# Altium PCB Mini-Rambo-ATX.PcbDoc (part 1 of 3)
Units mil, origin at the board's own origin, x right, y up, seen from the top; angles counter-clockwise.
Board outline 4133.86 x 2795.28 mil, 4 copper layers (Top, GND, Supply, Bottom), stack 61.811 mil thick; 252 components, 203 nets, 844 pads, 559 vias.
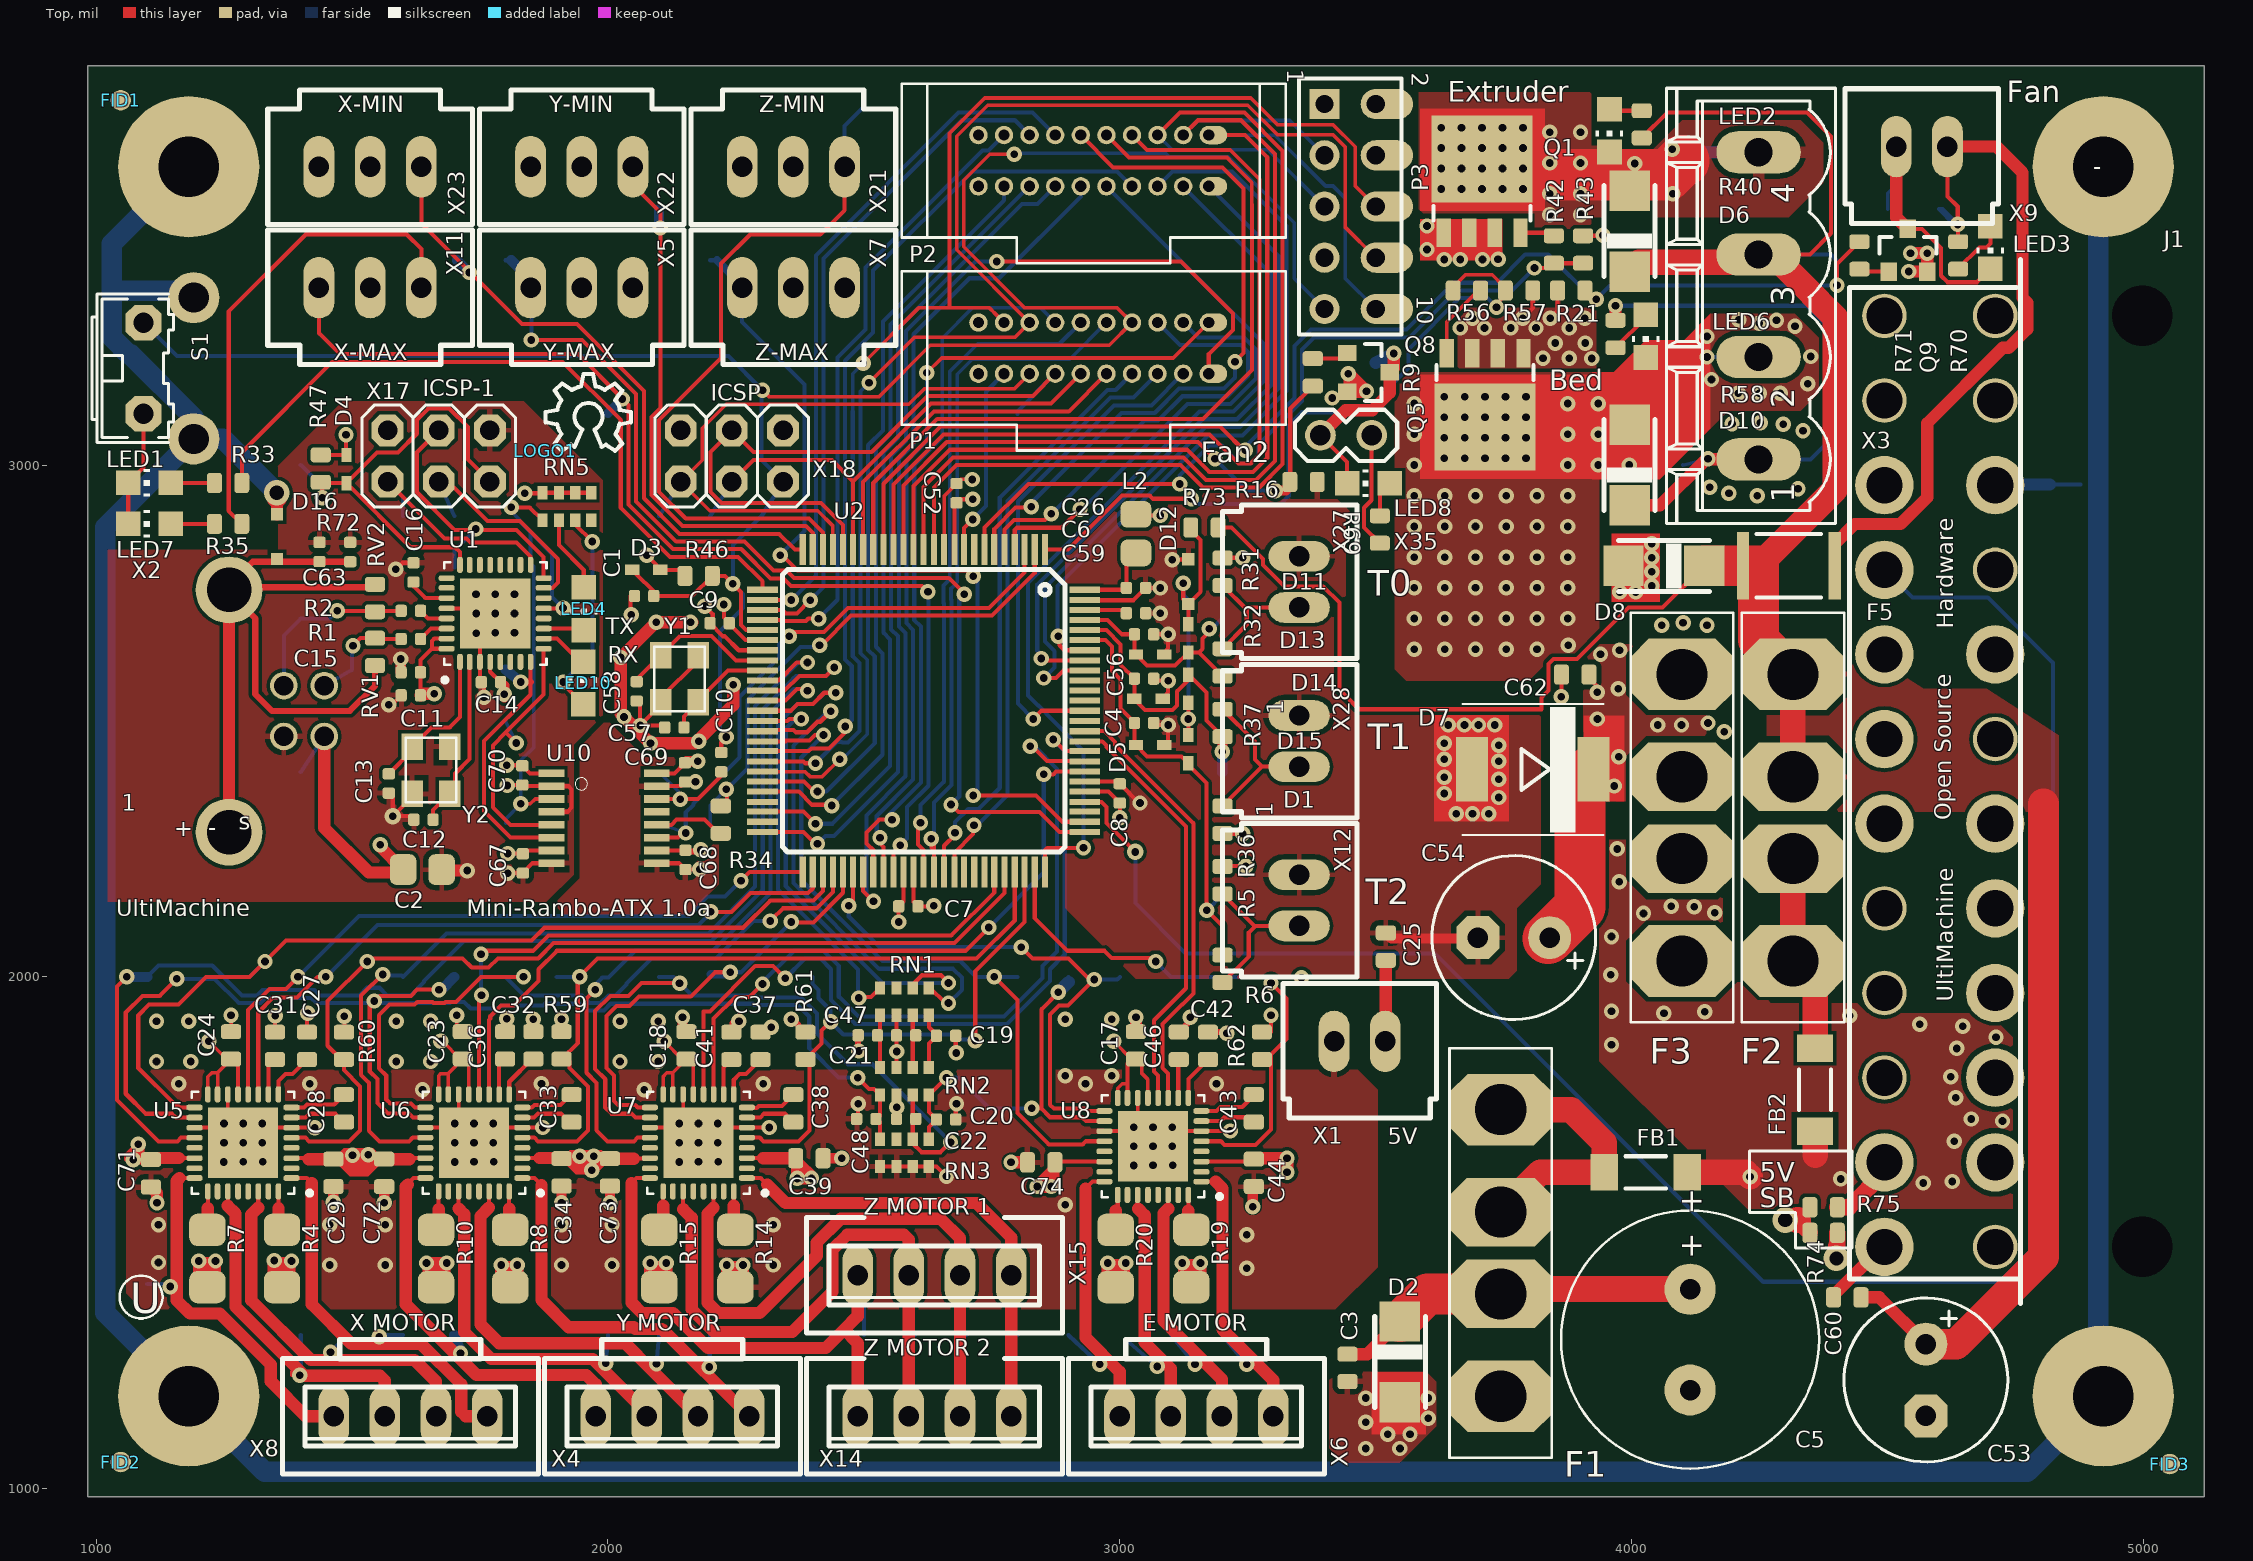
[diagram p0: Top view]
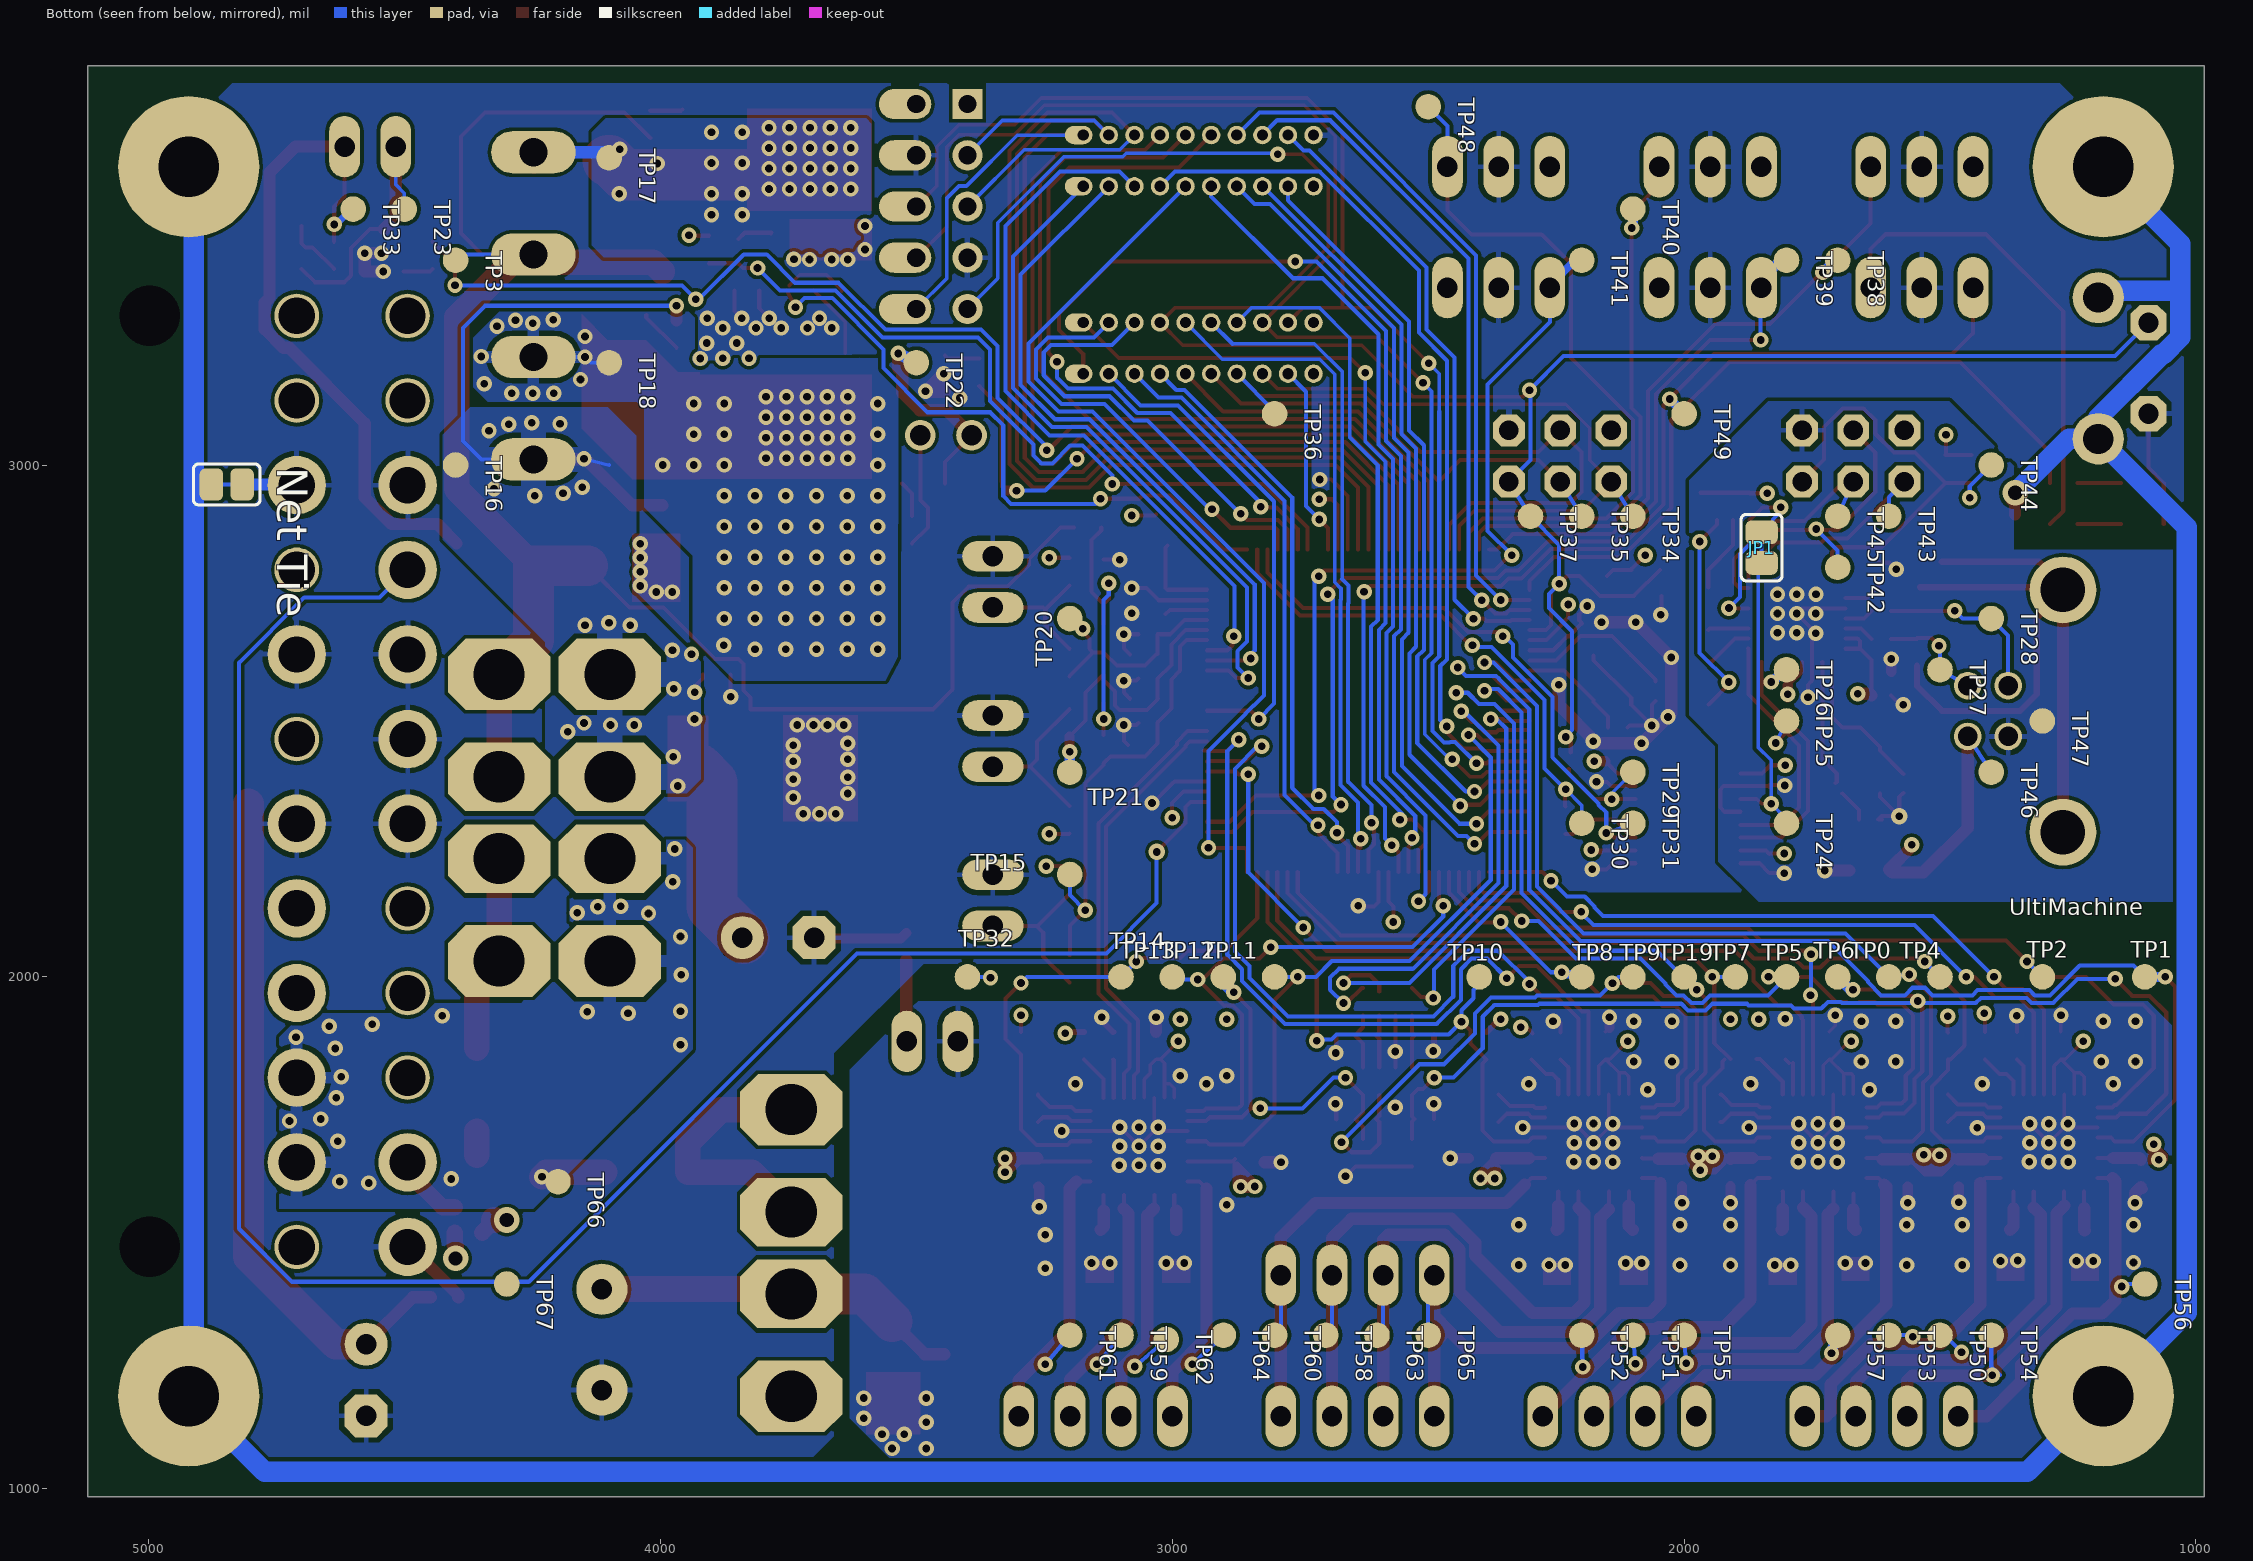
[diagram p1: Bottom view, seen from below]
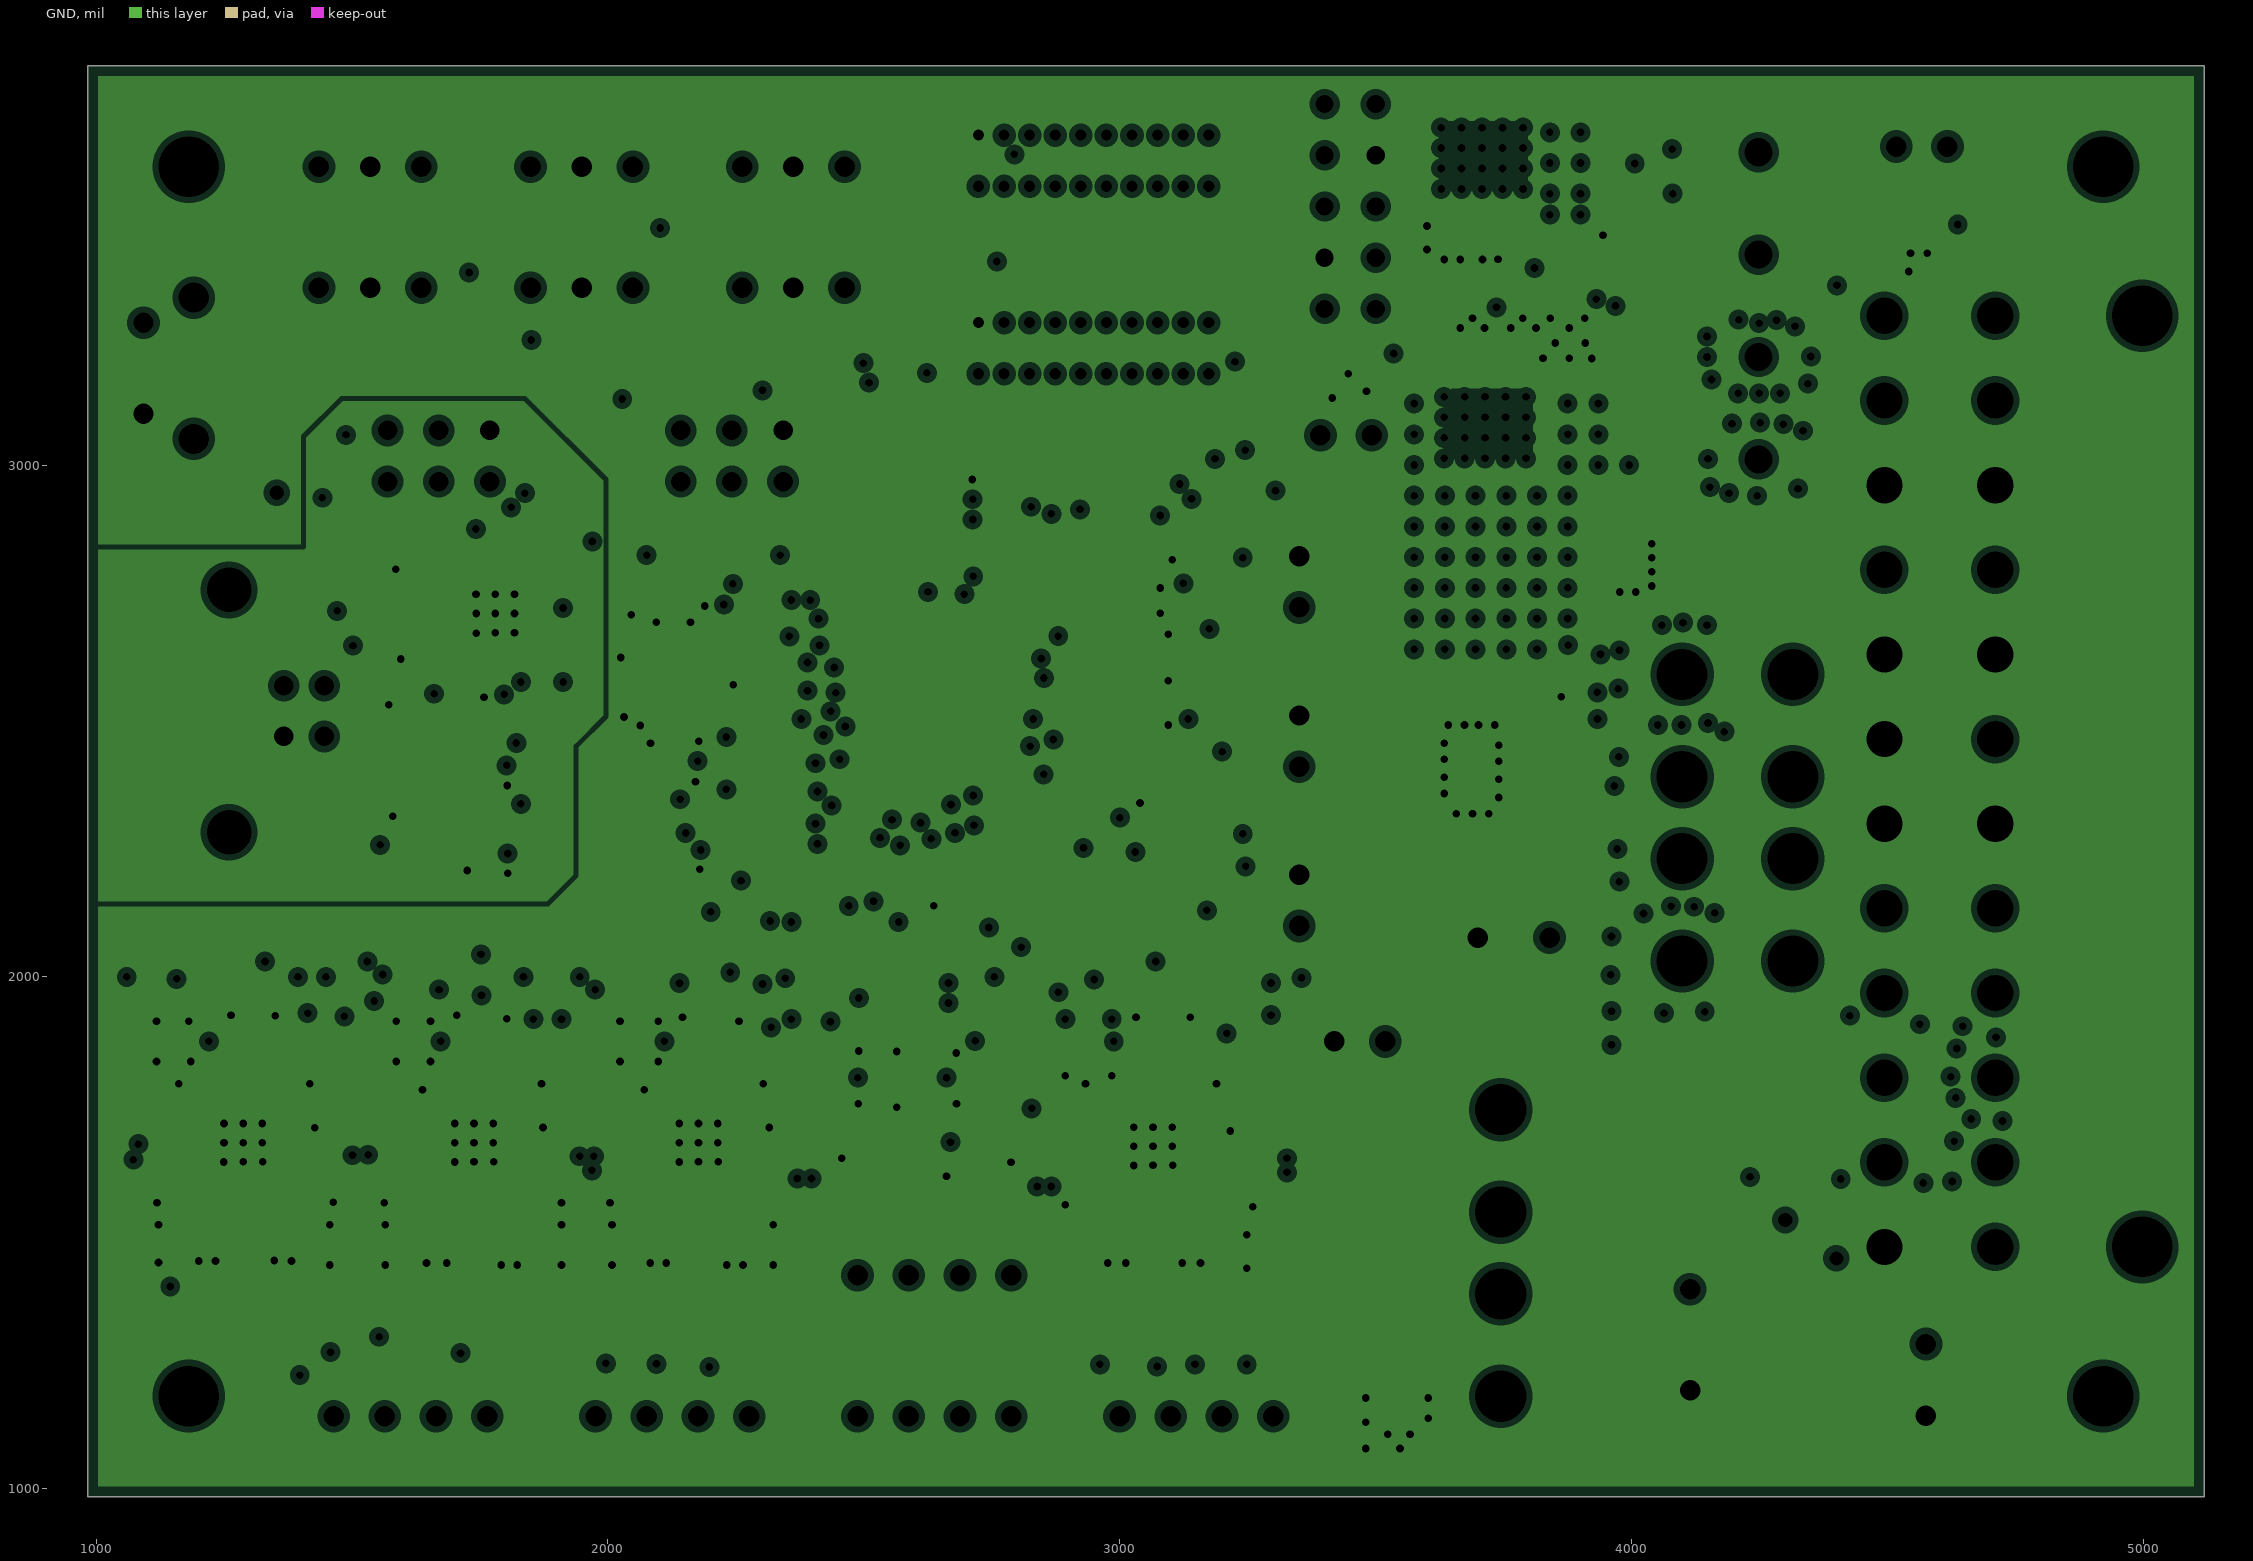
[diagram p2: GND, clearances drawn from the general rule]
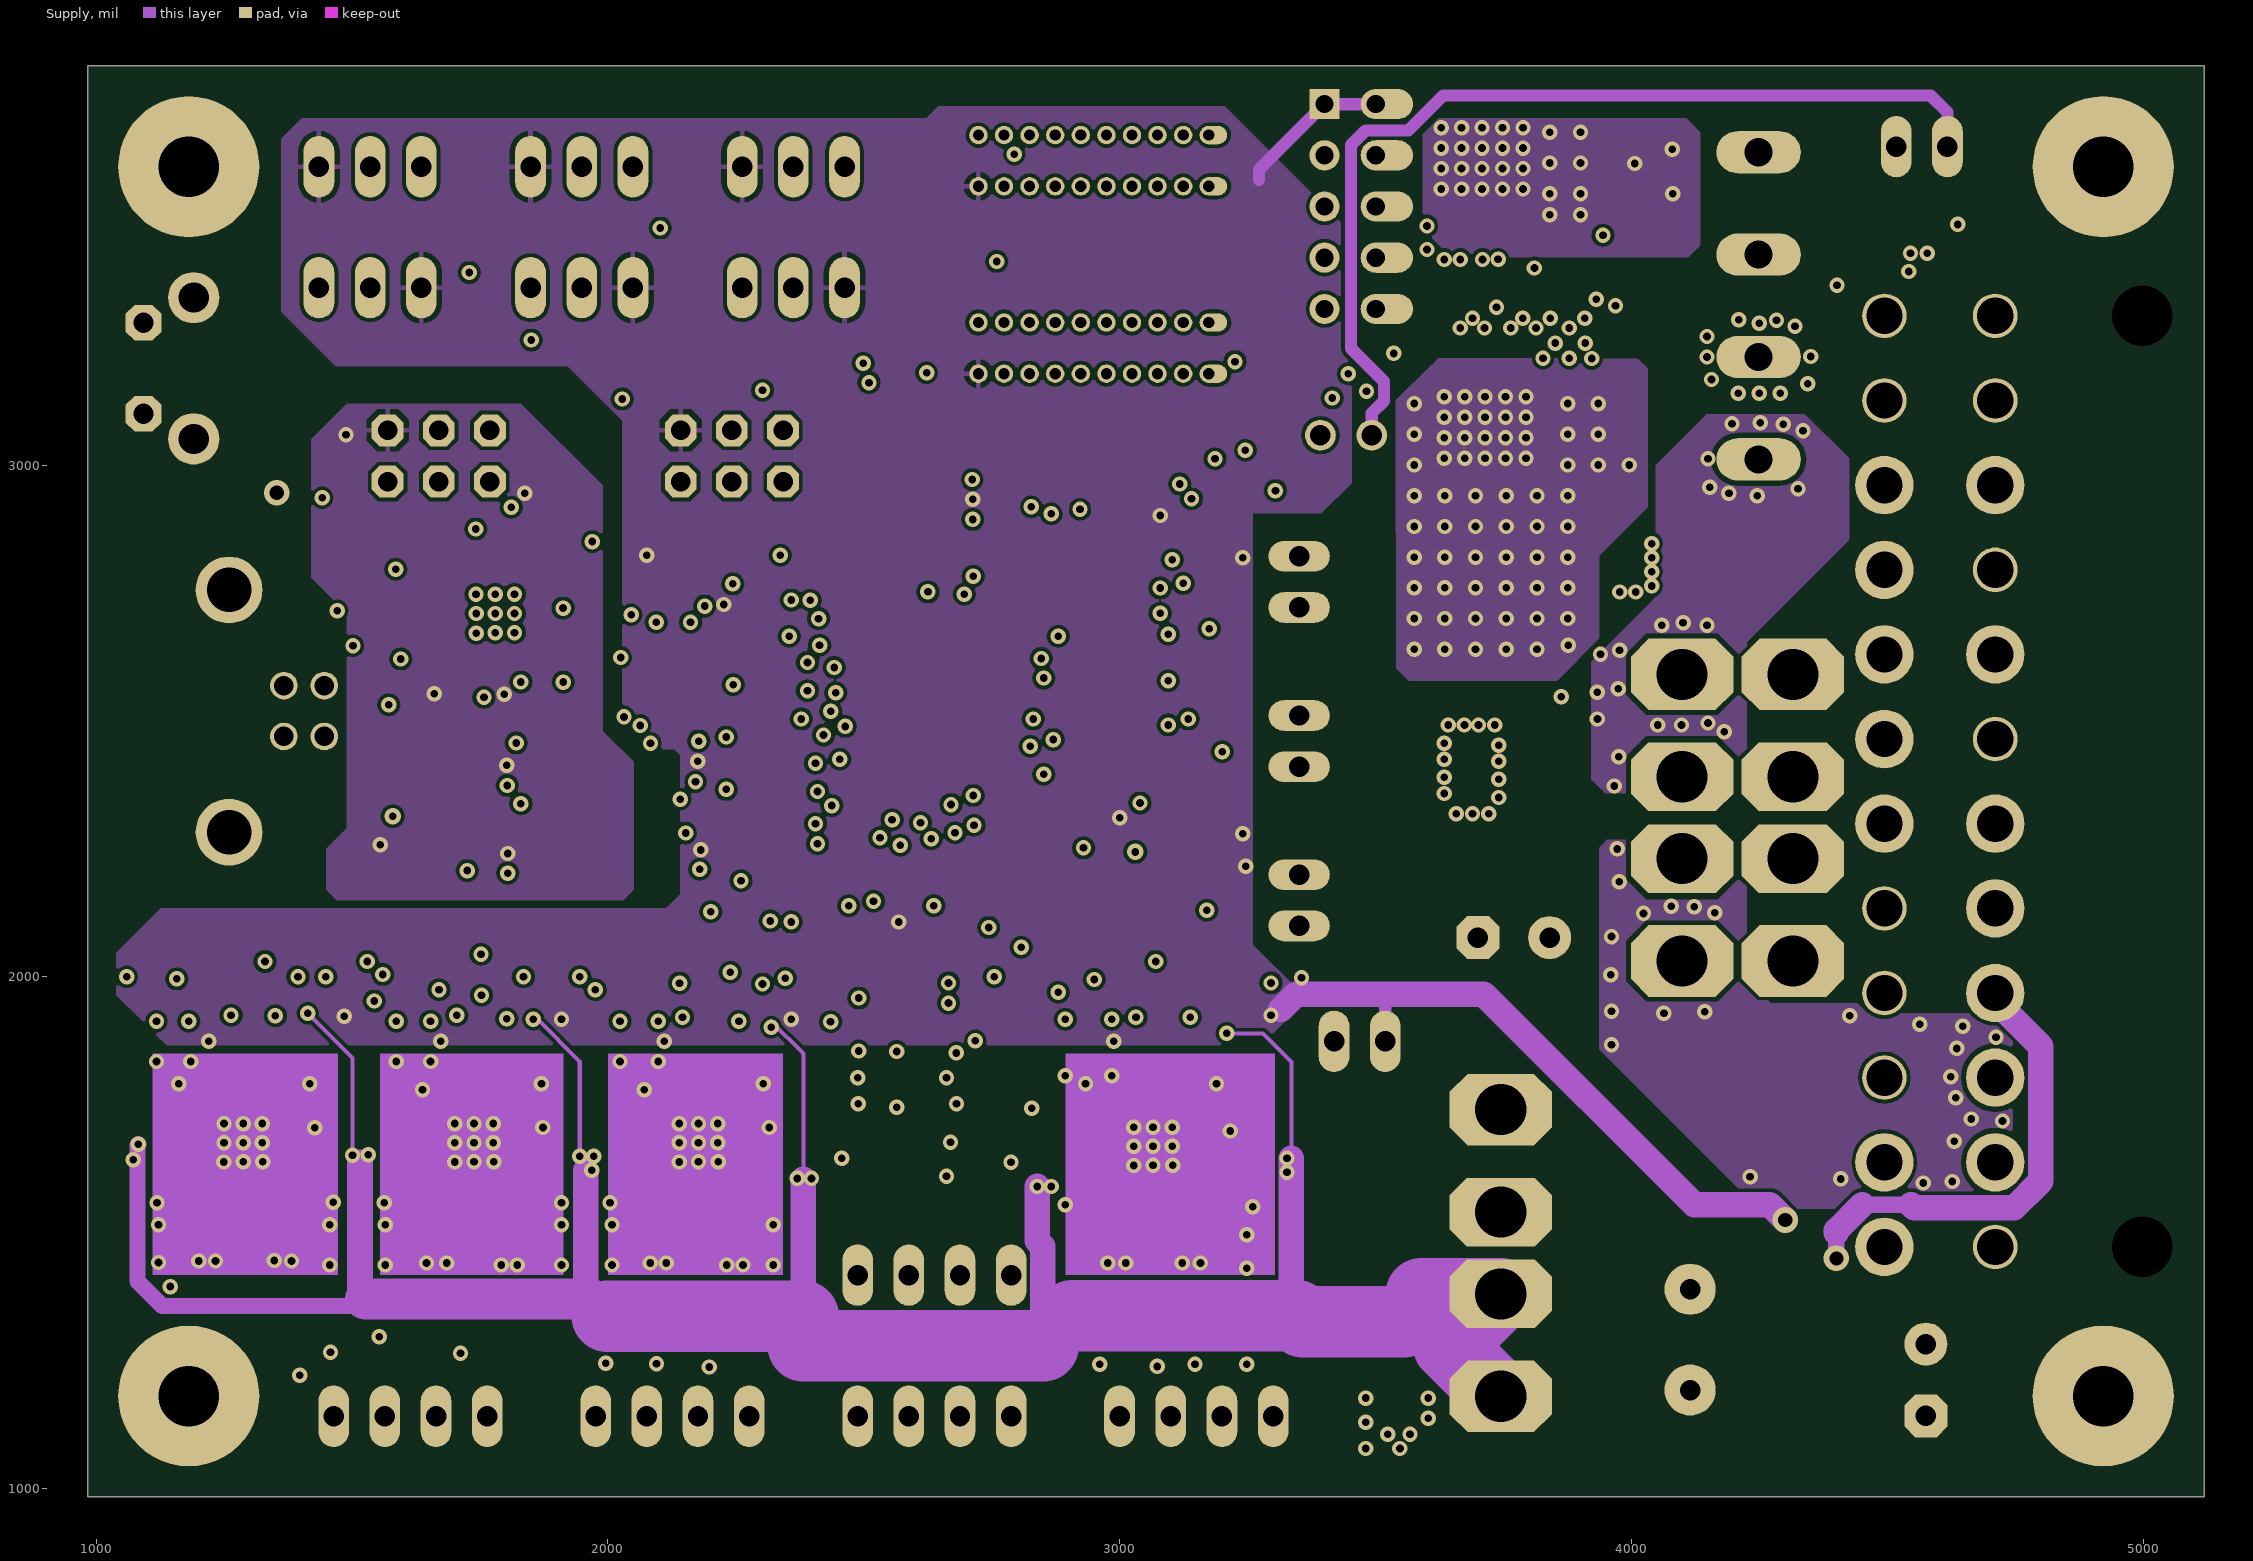
[diagram p3: Supply]

## Layer stack, top to bottom
Top Solder: solder mask 0.4724, Solder Resist, Dk 3.5
Top: signal copper 2.7559
Dielectric 1: prepreg 21.6535, FR-4, Dk 4.2
GND: plane copper 1.378, net (Multiple Nets)
Dielectric 2: core 10.2362, FR-4, Dk 4.2
Supply: signal copper 1.378
Dielectric 3: prepreg 21.6535, FR-4, Dk 4.2
Bottom: signal copper 2.7559
Bottom Solder: solder mask 0.4724, Solder Resist, Dk 3.5

## Board outline
984.25,984.25 984.25,3779.53 5118.11,3779.53 5118.11,984.25

## Design rules (kind name [scope] priority, off if disabled: settings)
AcuteAngle [All] p1: minimum=6.00000000000000E+0001 checktracksonly=FALSE
Clearance mdViaVia [IsVia vs IsVia] p1: gap=7
Clearance mdPadVia [IsPad vs IsVia] p2: gap=7
Clearance mdPadPad [IsPad vs IsPad] p3: gap=7
Clearance mdWireVia [(InLayerClass('Signal Layers') AND IsTrack) vs IsVia] p4: gap=7
Clearance mdWirePad [(InLayerClass('Signal Layers') AND IsTrack) vs IsPad] p5: gap=7
Clearance mdWireWire [(InLayerClass('Signal Layers') AND IsTrack) vs (InLayerClass('Signal Layers') AND IsTrack)] p6: gap=7
Clearance [All] p7: gap=7
ComponentClearance ComponentClearance_Connectors [InComponentClass('Connectors')] p1: gap=1 collisioncheckmode=3 verticalgap=10 showdistances=FALSE
ComponentClearance [All] p2: gap=10 collisioncheckmode=3 verticalgap=10 showdistances=FALSE
HoleSize [All] p1: absolutevalues=TRUE maxlimit=100000 minlimit=15 maxpercent=80.000 minpercent=20.000
HoleToHoleClearance [All] p1: gap=8 allowstackedmicrovias=TRUE
MinimumAnnularRing [All] p1: minimumring=7
MinimumSolderMaskSliver [All] p1: minsoldermaskwidth=4
PasteMaskExpansion [All] p1: expansion=-1
PlaneClearance [All] p1: clearance=12
PlaneConnect PowerPlaneConnect [InNet('+12V')] p1: planeconnectstyle=Relief reliefexpansion=20 reliefentries=4 reliefconductorwidth=24 reliefairgap=10
PlaneConnect PlaneConnect_Via [IsVia] p2: planeconnectstyle=Direct reliefexpansion=20 reliefentries=4 reliefconductorwidth=10 reliefairgap=10
PlaneConnect [All] p3: planeconnectstyle=Relief reliefexpansion=20 reliefentries=4 reliefconductorwidth=10 reliefairgap=10
PolygonConnect "ThermalVias, TP" [IsVia Or HasFootprint('TP1-27')] p1: connectstyle=Direct reliefconductorwidth=10 reliefentries=4 polygonreliefangle="90 Angle" airgapwidth=10
PolygonConnect BedOutConnect [OnTopLayer  AND InNet('NetD10_A')] p2: connectstyle=NoConnect reliefconductorwidth=10 reliefentries=4 polygonreliefangle="90 Angle" airgapwidth=10 // Disconnect toplayer connect
PolygonConnect PolygonConnect_12V3-Bot [InNet('+12V3') vs OnLayer('Bottom')] p3: connectstyle=Relief reliefconductorwidth=50 reliefentries=4 polygonreliefangle="90 Angle" airgapwidth=10
PolygonConnect PolygonConnect_12V3other [InNet('+12V3')] p4: connectstyle=NoConnect reliefconductorwidth=50 reliefentries=4 polygonreliefangle="90 Angle" airgapwidth=10
PolygonConnect PolygonConnect_Fets [(InNet('NetD6_A') OR InNet('NetD10_A'))] p5: connectstyle=Relief reliefconductorwidth=24 reliefentries=4 polygonreliefangle="90 Angle" airgapwidth=10
PolygonConnect PolygonConnect_Direct [InComponent('Q5')] p6: connectstyle=Direct reliefconductorwidth=24 reliefentries=4 polygonreliefangle="90 Angle" airgapwidth=10
PolygonConnect PolygonConnect_Fets_12V-INbot [InNet('12V-IN') vs OnLayer('Bottom')] p7: connectstyle=Relief reliefconductorwidth=24 reliefentries=4 polygonreliefangle="90 Angle" airgapwidth=10
PolygonConnect PolygonConnect_Fets_12V-INoth [InNet('12V-IN')] p8: connectstyle=NoConnect reliefconductorwidth=24 reliefentries=4 polygonreliefangle="90 Angle" airgapwidth=10
PolygonConnect [All] p9: connectstyle=Relief reliefconductorwidth=10 reliefentries=4 polygonreliefangle="90 Angle" airgapwidth=10
RoutingVias [All] p1: holewidth=15 width=30 viastyle="Through Hole" minholewidth=15 minwidth=30 maxholewidth=28 maxwidth=50
SMDToCorner [All] p1: distance=30000
SilkToSilkClearance [All] p1 off: silktosilkclearance=10
SilkToSolderMaskClearance [IsPad] p1 off: minsilkscreentomaskgap=10 clearancetoexposedcopper=TRUE
SolderMaskExpansion ViaTent [(IsVia)  And (HoleDiameter < 0.635   )] p1: expansion=-50
SolderMaskExpansion SolderMaskExpansion_Via [IsVia] p2: expansion=-20
SolderMaskExpansion [All] p3: expansion=3
UnConnectedPin [All] p1:
Width [All] p1: maxlimit=250 minlimit=7 preferedwidth=24 toplayer_prefwidth=8 midlayer1_minwidth=8 bottomlayer_maxwidth=40 bottomlayer_prefwidth=8 minimp=50.000000 maximp=50.000000 favimp=50.000000
20 further rules are at their usual default settings.

## Classes and differential pairs
component class Power-ATX: C3 C25 C53 C54 C60 C62 D2 D7 D8 F1 F2 F3 F5 FB1 FB2 J1 "Net Tie" R74 R75 TP32 TP66 TP67 X1 X16
component class Motors: C5 C17 C18 C23 C24 C27 C28 C29 C31 C32 C33 C34 C36 C37 C38 C39 C41 C42 C43 C44 C46 C71 C72 C73 C74 R4 R7 R8 R10 R14 R15 R19 R20 R59 R60 R61 R62 TP0 TP1 TP2 TP4 TP5 TP6 TP7 TP8 TP9 TP10 TP11 TP12 TP13 TP14 TP19 TP50 TP51 TP52 TP53 TP54 TP55 TP56 TP57 TP58 TP59 TP60 TP61 TP62 TP63 TP64 TP65 U5 U6 U7 U8 X4 X6 X8 X14 X15

## Components (designator, comment, footprint, x,y, rotation, side; value= is the part's Value field where it differs from the comment)
C1 "22pF" C0402 2070.87,2744.09 r180 top
C2 "10uF" C0805 1637.8,2209.65 r180 top
C3 "100nF" C0603 3444.88,1236.22 r270 top
C4 "100nF" C0402 3047.24,2496.06 r0 top
C5 "470uF" C12,5-5 4114.17,1291.34 r270 top
C6 "100nF" C0402 3031.5,2710.63 r0 top
C7 "100nF" C0402 2586.61,2137.8 r0 top
C8 "100nF" C0402 3000,2358.27 r90 top
C9 "100nF" C0402 2218.5,2690.94 r180 top
C10 "100nF" C0402 2221.46,2419.29 r90 top
C11 "100nF" C0402 1615,2550 r180 top
C12 "22pF" C0402 1639.76,2307.09 r180 top
C13 "22pF" C0402 1571.85,2377.95 r270 top
C14 "100nF" C0402 1771.65,2575.79 r180 top
C15 "100nF" C0402 1615,2595 r180 top
C16 "1uF" C0402 1620,2790 r90 top
C17 "100nF" C0603 3031.5,1866.14 r90 top
C18 "100nF" C0603 2153.54,1866.14 r90 top
C19 "1uF" C0402 2660.43,1884.84 r0 top
C20 "1uF" C0402 2660.43,1721.46 r0 top
C21 "1uF" C0402 2582.68,1885.83 r180 top
C22 "1uF" C0402 2582.68,1722.44 r180 top
C23 "100nF" C0603 1716.54,1866.14 r90 top
C24 "100nF" C0603 1263.78,1866.14 r90 top
C25 "100nF" C0603 3519.68,2059.06 r90 top
C26 "100nF" C0402 3031.5,2759.84 r0 top
C27 "100nF" C0603 1412.06,1865.33 r270 top
C28 "100nF" C0603 1484.25,1743.11 r90 top
C29 "100nF" C0603 1463.58,1617.13 r270 top
C31 "220nF" C0603 1349.42,1865.33 r270 top
C32 "100nF" C0603 1854.33,1866.14 r270 top
C33 "100nF" C0603 1929.13,1743.11 r90 top
C34 "100nF" C0603 1909.45,1618.11 r270 top
C36 "220nF" C0603 1799.21,1866.14 r270 top
C37 "100nF" C0603 2298.23,1865.16 r270 top
C38 "100nF" C0603 2362.2,1743.11 r90 top
C39 "100nF" C0603 2393.7,1645.67 r0 top
C41 "220nF" C0603 2241.14,1865.16 r270 top
C42 "100nF" C0603 3172.24,1865.33 r270 top
C43 "100nF" C0603 3261.81,1743.11 r90 top
C44 "100nF" C0603 3261.81,1617.13 r270 top
C46 "220nF" C0603 3115.16,1865.33 r270 top
C47 "1uF" C0402 2507.87,1885.83 r180 top
C48 "1uF" C0402 2504.92,1722.44 r180 top
C52 "100nF" C0402 2681.1,2944.88 r90 top
C53 "100uF" C3,5-8 4574.8,1212.6 r270 top
C54 "100uF" C3,5-8 3769.68,2076.77 r180 top
C56 "100nF" C0402 3047.24,2582.68 r0 top
C57 "22pF" C0402 2129.92,2487.2 r180 top
C58 "22pF" C0402 2056.1,2558.07 r270 top
C59 "100nF" C0402 3047.24,2669.29 r0 top
C60 "100nF" C0603 4421.26,1374.02 r180 top
C62 "100nF" C0603 3889.76,2590.55 r180 top
C63 "4.7nF" C0402 1436.5,2830 r90 top
C67 "100nF" C0402 1833.66,2221.46 r90 top
C68 "100nF" C0402 2151.57,2228.35 r90 top
C69 "100nF" C0402 2150.59,2399.61 r270 top
C70 "100nF" C0402 1832.68,2393.7 r270 top
C71 "100nF" C0603 1107.24,1616.26 r270 top
C72 "100nF" C0603 1562.99,1617.13 r270 top
C73 "100nF" C0603 2003.94,1618.11 r270 top
C74 "100nF" C0603 2846.46,1637.8 r180 top
D1 "1N4148WT" SOD523 3133.86,2444.88 r270 top
D2 "SMAJ30A" SMA-SM 3547.24,1248.03 r270 top
D3 "1N4148WT" SOD523 2074.8,2795.28 r180 top
D4 "1N4148WT" SOD523 1489.17,2992.13 r270 top
D5 "1N4148WT" SOD523 3059.06,2452.76 r0 top
D6 "SK310A-TP" SMA-SM 3996.06,3456.69 r90 top
D7 "S3A-13-F" DO-214AB 3807.09,2405.51 r180 top
D8 "SK310A-TP" SMA-SM 4062.99,2803.15 r180 top
D10 "SK310A-TP" SMA-SM 3996.06,3000 r90 top
D11 "1N4148WT" SOD523 3133.86,2661.42 r270 top
D12 "SZMM3Z4V7T1G" SOD323-R 3133.86,2771.65 r90 top
D13 "1N4148WT" SOD523 3059.06,2629.92 r0 top
D14 "1N4148WT" SOD523 3133.86,2562.99 r90 top
D15 "1N4148WT" SOD523 3056.1,2543.31 r0 top
D16 "RSB39VTE-17" SOD323-R 1353.35,2860.24 r270 top
F1 "3522-2" 3522-2 3744.09,1460.63 r270 top
F2 "3522-2" 3522-2 4314.96,2311.02 r90 top
F3 "3522-2" 3522-2 4098.43,2311.02 r90 top
F5 "PTS181233V075" "PTS1812 Fuse" 4307.09,2803.15 r0 top
FB1 "BLM41PG600SN1L" L1806 4027.56,1618.11 r180 top
FB2 "BLM41PG600SN1L" L1806 4358.27,1779.53 r90 top
FID1 "FIDUCIAL" FIDUCIAL-1X2 1048.23,3712.6 r0 top
FID2 "FIDUCIAL" FIDUCIAL-1X2 1048.23,1052.17 r0 top
FID3 "FIDUCIAL" FIDUCIAL-1X2 5051.18,1048.23 r0 top
J1 "ATX" ATX24 4897.64,2381.89 r90 top
JP1 "SJ" SJ 1848.43,2838.58 r270 bottom
L2 "CBC2012T100M" C0805 3031.5,2866.14 r270 top
LED1 "5988140107F" LED2012120 1105,2965 r180 top
LED2 "5988110107F" LED2012120 3956.69,3653.54 r270 top
LED3 "5988110107F" LED2012120 4700.79,3425.2 r270 top
LED4 "5988140107F" LED2012120 1952.76,2719.49 r270 top
LED6 "5988110107F" LED2012120 4027.56,3251.97 r270 top
LED7 "5988170107F" LED2012120 1105,2885 r180 top
LED8 "5988110107F" LED2012120 3486,2964 r180 top
LED10 "5988140107F" LED2012120 1951.77,2573.82 r90 top
LOGO1 "OSHW_LOGO_8MILX0150-NT" OSHW_8X150_NOTEXT 1877.95,3027.56 r0 top
"Net Tie" "NetTie" "Net Tie" 4847,2962 r180 bottom net-tie
P1 "5-104068-1" 10X2-0.05X0.1w 2948.82,3228.35 r180 top
P2 "5-104068-1" 10X2-0.05X0.1w 2948.82,3594.49 r180 top
P3 "5x2 IDCw" "2x5 IDCw" 3400,3705 r270 top
Q1 "PSMN7R0-60YS,115" SOT669 3707.68,3554.13 r0 top
Q5 "PSMN7R0-60YS,115" SOT669 3713.58,3118.11 r180 top
Q8 "IRLML6346TRPBF" SOT23-3 3483.35,3181.32 r270 top
Q9 "IRLML6346TRPBF" SOT23-3 4539.37,3417.32 r0 top
R1 "22r" R0402 1615,2660 r0 top
R2 "22r" R0402 1615,2715 r0 top
R4 "0.1r" R1206 1363.19,1449.8 r270 top
R5 "4.7K" R0603 3200.79,2188.98 r90 top
R6 "4.7K" R0603 3200.78,2015.75 r270 top
R7 "0.1r" R1206 1217.52,1449.8 r270 top
R8 "0.1r" R1206 1809.06,1449.8 r270 top
R9 "10r" R0603 3377,3181 r90 top
R10 "0.1r" R1206 1664.37,1449.8 r270 top
R14 "0.1r" R1206 2249.02,1449.8 r270 top
R15 "0.1r" R1206 2100.39,1449.8 r270 top
R16 "100K" R0603 3359,2967 r0 top
R19 "0.1r" R1206 3139.76,1449.8 r270 top
R20 "0.1r" R1206 2992.13,1449.8 r270 top
R21 "100K" R0603 3882,3341 r180 top
R31 "4.7K" R0603 3200.79,2791.34 r90 top
R32 "4.7K" R0603 3200.79,2614.17 r90 top
R33 "1K" R0603 1258,2965 r180 top
R34 "1K" R0603 2220.47,2307.09 r90 top
R35 "1K" R0603 1258,2885 r180 top
R36 "4.7K" R0603 3200.79,2307.09 r270 top
R37 "4.7K" R0603 3200.79,2496.06 r90 top
R40 "1.8K" R0603 4019.68,3665.35 r270 top
R42 "10r" R0603 3848,3421 r90 top
R43 "100K" R0603 3905,3421 r90 top
R46 "10K" R0603 2177.17,2783.46 r180 top
R47 "10K" R0603 1438.98,2993.11 r90 top
R56 "10r" R0603 3678,3341 r0 top
R57 "100K" R0603 3780,3341 r0 top
R58 "1.8K" R0603 3968.5,3255.91 r90 top
R59 "100K" R0603 1909.45,1866.14 r270 top
R60 "100K" R0603 1484.25,1865.16 r270 top
R61 "100K" R0603 2385.83,1865.33 r270 top
R62 "100K" R0603 3277.56,1865.33 r270 top
R69 "1.8K" R0603 3508,2874 r270 top
R70 "1.8K" R0603 4637.8,3409.45 r90 top
R71 "10r" R0603 4444.88,3409.45 r270 top
R72 "1M" R0402 1496.5,2830.01 r270 top
R73 "10K" R0603 3165.35,2877.95 r0 top
R74 "0r" R0603 4375,1500 r0 top
R75 "0r" R0603 4375,1550 r180 top
RN1 "10K" CAY16 2579.72,1951.77 r180 top
RN2 "10K" CAY16 2579.72,1796.26 r180 top
RN3 "10K" CAY16 2579.72,1656.5 r180 top
RN5 "1K" CAY16 1920.28,2919.29 r180 top
RV1 "CG0603MLC-05E" R0603 1545,2635 r90 top
RV2 "CG0603MLC-05E" R0603 1545,2740 r270 top
S1 "1571610-2" B3F-31XX 1141.73,3188.98 r270 top
TP0 "TestPoint" TP1-27 1600,2000 r180 bottom
TP1 "TestPoint" TP1-27 1100,2000 r180 bottom
TP2 "TestPoint" TP1-27 1300,2000 r180 bottom
TP3 "TestPoint" TP1-27 4400,3400 r180 bottom
TP4 "TestPoint" TP1-27 1500,2000 r180 bottom
TP5 "TestPoint" TP1-27 1800,2000 r180 bottom
TP6 "TestPoint" TP1-27 1700,2000 r180 bottom
TP7 "TestPoint" TP1-27 1900,2000 r180 bottom
TP8 "TestPoint" TP1-27 2200,2000 r180 bottom
TP9 "TestPoint" TP1-27 2100,2000 r180 bottom
TP10 "TestPoint" TP1-27 2400,2000 r180 bottom
TP11 "TestPoint" TP1-27 2800,2000 r180 bottom
TP12 "TestPoint" TP1-27 2900,2000 r180 bottom
TP13 "TestPoint" TP1-27 3000,2000 r180 bottom
TP14 "TestPoint" TP1-27 3100,2000 r180 bottom
TP15 "TestPoint" TP1-27 3200,2200 r90 bottom
TP16 "TestPoint" TP1-27 4400,3000 r180 bottom
TP17 "TestPoint" TP1-27 4100,3600 r180 bottom
TP18 "TestPoint" TP1-27 4100,3200 r180 bottom
TP19 "TestPoint" TP1-27 2000,2000 r180 bottom
TP20 "TestPoint" TP1-27 3200,2700 r180 bottom
TP21 "TestPoint" TP1-27 3200,2400 r180 bottom
TP22 "TestPoint" TP1-27 3500,3200 r180 bottom
TP23 "TestPoint" TP1-27 4500,3500 r180 bottom
TP24 "TestPoint" TP1-27 1800,2300 r180 bottom
TP25 "TestPoint" TP1-27 1800,2500 r180 bottom
TP26 "TestPoint" TP1-27 1800,2600 r180 bottom
TP27 "TestPoint" TP1-27 1500,2600 r180 bottom
TP28 "TestPoint" TP1-27 1400,2700 r180 bottom
TP29 "TestPoint" TP1-27 2100,2400 r180 bottom
TP30 "TestPoint" TP1-27 2200,2300 r180 bottom
TP31 "TestPoint" TP1-27 2100,2300 r180 bottom
TP32 "TestPoint" TP1-27 3400,2000 r90 bottom
TP33 "TestPoint" TP1-27 4600,3500 r180 bottom
TP34 "TestPoint" TP1-27 2100,2900 r180 bottom
TP35 "TestPoint" TP1-27 2200,2900 r180 bottom
TP36 "TestPoint" TP1-27 2800,3100 r180 bottom
TP37 "TestPoint" TP1-27 2300,2900 r180 bottom
TP38 "TestPoint" TP1-27 1700,3400 r180 bottom
TP39 "TestPoint" TP1-27 1800,3400 r180 bottom
TP40 "TestPoint" TP1-27 2100,3500 r180 bottom
TP41 "TestPoint" TP1-27 2200,3400 r180 bottom
TP42 "TestPoint" TP1-27 1700,2800 r180 bottom
TP43 "TestPoint" TP1-27 1600,2900 r180 bottom
TP44 "TestPoint" TP1-27 1400,3000 r180 bottom
TP45 "TestPoint" TP1-27 1700,2900 r180 bottom
TP46 "TestPoint" TP1-27 1400,2400 r180 bottom
TP47 "TestPoint" TP1-27 1300,2500 r180 bottom
TP48 "TestPoint" TP1-27 2500,3700 r180 bottom
TP49 "TestPoint" TP1-27 2000,3100 r180 bottom
TP50 "TestPoint" TP1-27 1500,1300 r180 bottom
TP51 "TestPoint" TP1-27 2100,1300 r180 bottom
TP52 "TestPoint" TP1-27 2200,1300 r180 bottom
TP53 "TestPoint" TP1-27 1600,1300 r180 bottom
TP54 "TestPoint" TP1-27 1400,1300 r180 bottom
TP55 "TestPoint" TP1-27 2000,1300 r180 bottom
TP56 "TestPoint" TP1-27 1100,1400 r180 bottom
TP57 "TestPoint" TP1-27 1700,1300 r180 bottom
TP58 "TestPoint" TP1-27 2700,1300 r180 bottom
TP59 "TestPoint" TP1-27 3100,1300 r180 bottom
TP60 "TestPoint" TP1-27 2800,1300 r180 bottom
TP61 "TestPoint" TP1-27 3200,1300 r180 bottom
TP62 "TestPoint" TP1-27 3011.63,1291.71 r180 bottom
TP63 "TestPoint" TP1-27 2600,1300 r180 bottom
TP64 "TestPoint" TP1-27 2900,1300 r180 bottom
TP65 "TestPoint" TP1-27 2500,1300 r180 bottom
TP66 "TestPoint" TP1-27 4200,1600 r180 bottom
TP67 "TestPoint" TP1-27 4300,1400 r180 bottom
U1 "Atmega32u2" QFN32_050050 1780,2710 r90 top
U2 "Atmega2560" TQFP100_140140_012 2616.79,2520 r270 top
U5 "A4982" QFN32_050050 1287.4,1676.01 r180 top
U6 "A4982" QFN32_050050 1738.31,1676.01 r180 top
U7 "A4982" QFN32_050050 2176.93,1676.01 r180 top
U8 "A4982" QFN32_050050 3064.96,1669.12 r180 top
U10 "ADUM7441" QSOP16 1992.13,2310.04 r270 top
X1 "C-GRID-02-70543" 70543-02 3468.5,1874.02 r0 top
X2 "USB-B" PN61729 1259.84,2519.68 r270 top
X3 "0395311004" MSTBV4 4248.03,3311.02 r90 top
X4 "MPT4" 4POL254 2125.98,1141.73 r180 top
X5 "C-GRID-03-70543" 70543-03 1948.82,3346.46 r0 top
X6 "MPT4" 4POL254 3149.61,1141.73 r180 top
X7 "C-GRID-03-70543" 70543-03 2362.2,3346.46 r0 top
X8 "MPT4" 4POL254 1614.17,1141.73 r180 top
X9 "C-GRID-02-70543" 70543-02 4566.93,3622.05 r0 top
X11 "C-GRID-03-70543" 70543-03 1535.43,3346.46 r0 top
X12 "C-GRID-02-70543" 70543-02 3350.39,2149.61 r270 top
X14 "MPT4" "4POL254 noPol" 2637.8,1141.73 r180 top
X15 "MPT4" "4POL254 noPol" 2637.8,1417.32 r180 top
X17 "PINHD-2X3" 2X03 1669.53,3017.56 r0 top
X18 "PINHD-2X3" 2X03 2242.13,3017.56 r0 top
X21 "C-GRID-03-70543" 70543-03 2362.2,3582.68 r180 top
X22 "C-GRID-03-70543" 70543-03 1948.82,3582.68 r180 top
X23 "C-GRID-03-70543" 70543-03 1535.43,3582.68 r180 top
X27 "C-GRID-02-70543" 70543-02 3350.39,2771.65 r270 top
X28 "C-GRID-02-70543" 70543-02 3350.39,2460.63 r270 top
X35 "M02PTH" 1X02 3492,3058 r180 top
Y1 "7M-16.000MEEQ-T" CRYS320250 2140.15,2581.99 r90 top
Y2 "7M-16.000MEEQ-T" CRYS320250 1653.95,2404.12 r270 top

## Footprints (in the part's own frame and the unit in brackets; to place one, negate y for a bottom-side part, rotate by r counter-clockwise, add the part's x,y. Pads: shape width x height; smd on the part's side, far side on the other; paste and mask are expansions set on the pad)
1X02 [mil]
  round 60 hole 40: 1(0,0) 2(100,0)
  silkscreen extent -50,-50 150,50, body extent -54,-54 154,54, height 336
2X03 [mil]
  oct 62x62 hole 38: 1(-100,-50) 2(-100,50) 3(0,-50) 4(0,50) 5(100,-50) 6(100,50)
  silkscreen extent -150,-100 150,100, body extent -153,-103 153,103, height 336
"2x5 IDCw" [mm]
  rect 1.5x1.5 hole 0.9: 1(0,0)
  oval 1.5x2.6 hole 0.9 copper offset 0,0.55: 2(0,2.54) 4(2.54,2.54) 6(5.08,2.54) 8(7.62,2.54) 10(10.16,2.54)
  round 1.5 hole 0.9: 3(2.54,0) 5(5.08,0) 7(7.62,0) 9(10.16,0)
  silkscreen extent -1.27,-1.27 11.43,3.81, body extent -1.37,-1.37 11.53,3.91, height 12.7
4POL254 [mil]
  oval 60x120 hole 40: 1(-150,0) 2(-50,0) 3(50,0) 4(150,0)
  silkscreen extent -250,-150 250,113, body extent -250,-150 250,113, height 454
"4POL254 noPol" [mil]
  oval 60x120 hole 40: 1(-150,0) 2(-50,0) 3(50,0) 4(150,0)
  silkscreen extent -250,-113 250,113, body extent -250,-150 250,113, height 454
10X2-0.05X0.1w [mil]
  round 36 hole 22: P$1(225,50) P$2(225,-50) P$3(175,50) P$4(175,-50) P$5(125,50) P$6(125,-50) P$7(75,50) P$8(75,-50) P$9(25,50) P$10(25,-50) P$11(-25,50) P$12(-25,-50) P$13(-75,50) P$14(-75,-50) P$15(-125,50) P$16(-125,-50) P$17(-175,50) P$18(-175,-50)
  oval 54x36 hole 22 copper offset -9,0: P$19(-225,50) P$20(-225,-50)
  silkscreen extent -375,-150 375,200, body extent -375,-150 375,200, height 591
3522-2 [mil] "3522-2"
  oct 140x200 hole 100: 1(-280,0) 2(280,0)
  oct 133.86x200 hole 100: 1(-80,0) 2(80,0)
  silkscreen extent -400,-100 400,100, body extent -402,-103 402,103, height 709
70543-02 [mil]
  oval 60x120 hole 40: 1(-50,0) 2(50,0)
  silkscreen extent -150,-150 150,113, body extent -150,-150 150,113, height 450
70543-03 [mil]
  oval 60x120 hole 40: 1(-100,0) 2(0,0) 3(100,0)
  silkscreen extent -200,-150 200,113, body extent -200,-150 200,113, height 450
ATX24 [mm]
  round 0 hole 3 unplated paste-99 mask-0.102: 0(-23.1,-2.54) 1(23.1,-2.54)
  round 2.21 hole 1.8 paste-99: 1(23.1,4.76) 2(18.9,4.76) 4(10.5,4.76) 6(2.1,4.76) 12(-23.1,4.76) 13(23.1,10.26) 14(18.9,10.26) 20(-6.3,10.26) 21(-10.5,10.26) 22(-14.7,10.26)
  round 2.9 hole 1.8 paste-99: 3(14.7,4.76) 5(6.3,4.76) 7(-2.1,4.76) 8(-6.3,4.76) 9(-10.5,4.76) 10(-14.7,4.76) 11(-18.9,4.76) 15(14.7,10.26) 16(10.5,10.26) 17(6.3,10.26) 18(2.1,10.26) 19(-2.1,10.26) 23(-18.9,10.26) 24(-23.1,10.26)
  silkscreen extent -25.9,3.5 25.9,12, body extent -25.9,-9.1 25.9,11.81, height 20
B3F-31XX [mil]
  oct 70x70 hole 40: 1(-89,-49) 2(89,-49)
  round 100 hole 59: 3(-138,49) 4(138,49)
  silkscreen extent -145,-150 145,10, body extent -165,-200 165,109, height 303
C3,5-8 [mil]
  round 84 hole 40: 1(-70,0)
  oct 84x84 hole 40: 2(70,0)
  silkscreen extent -160,-160 160,160, body extent -160,-160 160,160, height 512
C12,5-5 [mil]
  round 100 hole 40: 1(-98.43,0) 2(98.43,0)
  silkscreen extent -252,-252 252,252, body extent -252,-252 252,252, height 787
C0402 [mil]
  rrect40% 22x24 smd: 1(-18.7,0) 2(19,0)
  body extent -20,-10 20,10, height 20
C0603 [mm]
  rrect40% 0.74x1 smd: 1(-0.68,0) 2(0.68,0)
  body extent -0.8,-0.4 0.8,0.4, height 0.8
C0805 [mil]
  rrect50% 52x60 smd: 1(-37.4,0) 2(38,0)
  body extent -40,-30 40,30, height 35
CAY16 [mil]
  rect 20x26 smd: 1(-47.24,-26.57) 2(-15.75,-26.57) 3(16,-26.57) 4(48,-26.57) 5(48,27) 6(16,27) 7(-15.75,27) 8(-47.24,27)
  body extent -61,-30 62,30, height 20
CRYS320250 [mil]
  rect 52x42 smd: 1(-45.28,-36.42) 2(46,-36.42) 3(46,37) 4(-45.28,37)
  silkscreen extent -63,-49 63,50, body extent -63,-49 63,50, height 28
DO-214AB [mil]
  rect 63x126 smd: A(119,0) C(-118.11,0)
  silkscreen extent -138,-128 138,128, body extent -140,-130 140,130, height 98
FIDUCIAL-1X2 [mil]
  rrect100% 40x40 smd paste-3897.64 mask+20: 1(0,0)
  body extent -40,-40 40,40, height 1
L1806 [mm] "Chip Inductor, 2-Leads, Body 4.50x1.60mm, IPC Medium Density"
  rect 1.38x1.8 smd: 1(-2.06,0) 2(2.06,0)
  silkscreen extent -1,-0.8 1,0.8, body extent -2.35,-0.9 2.35,0.9, height 1.8
LED2012120 [mil]
  rect 48x48 smd: A(-41.34,0) C(42,0)
  silkscreen extent 0,-27 12,27, body extent -50,-25 50,25, height 28
MSTBV4 [mil]
  oval 82.5x165 hole 55: 1(-300,0) 2(-100,0) 3(100,0) 4(300,0)
  silkscreen extent -425,-150 425,180, body extent -428,-153 428,183, height 472
"Net Tie" [mil]
  rrect50% 46x63 smd: 1(-30,0) 2(30,0)
  Top lines w8: 30,0 -30,0
  silkscreen extent -65,-40 65,40, body extent -53,-31 53,31, height 4
OSHW_8X150_NOTEXT [mil]
  silkscreen extent 0,0 167,150, body extent 0,2 168,148
PN61729 [mil]
  round 54 hole 38: 1(50,186) 2(-49.21,186) 3(-49.21,107) 4(50,107)
  round 130.5 hole 87: P$1(-236.22,0) P$2(237,0)
  body extent -237,-405 238,226, height 406
"PTS1812 Fuse" [mm]
  rect 0.6x3.35 smd: 1(-2.275,0) 2(2.275,0)
  silkscreen extent -1.6,-1.58 1.6,1.58, body extent -2.36,-1.71 2.37,1.71, height 1.2
QFN32_050050 [mm]
  rrect80% 0.8x0.28 smd mask+0.05: 1(-2.4,1.753) 2(-2.4,1.27) 3(-2.4,0.762) 4(-2.4,0.254) 5(-2.4,-0.25) 6(-2.4,-0.75) 7(-2.4,-1.25) 8(-2.4,-1.75) 17(2.413,-1.75) 18(2.413,-1.25) 19(2.413,-0.75) 20(2.413,-0.25) 21(2.413,0.254) 22(2.413,0.762) 23(2.413,1.27) 24(2.413,1.753)
  rrect80% 0.28x0.8 smd mask+0.05: 9(-1.75,-2.4) 10(-1.25,-2.4) 11(-0.75,-2.4) 12(-0.25,-2.4) 13(0.254,-2.4) 14(0.762,-2.4) 15(1.27,-2.4) 16(1.753,-2.4) 25(1.753,2.413) 26(1.27,2.413) 27(0.762,2.413) 28(0.254,2.413) 29(-0.25,2.413) 30(-0.75,2.413) 31(-1.25,2.413) 32(-1.75,2.413)
  rect 3.48x3.48 smd paste-4 mask-4: 33(0,0)
  silkscreen extent -3.4,-2.54 2.54,2.6, body extent -2.84,-2.84 2.86,2.86, height 1
QSOP16 [mil]
  rect 15x50 smd: 1(-87.5,-102.36) 2(-62.5,-102.36) 3(-37.5,-102.36) 4(-12.5,-102.36) 5(13,-102.36) 6(38,-102.36) 7(63,-102.36) 8(88,-102.36) 9(88,103) 10(63,103) 11(38,103) 12(13,103) 13(-12.5,103) 14(-37.5,103) 15(-62.5,103) 16(-87.5,103)
  silkscreen extent -79,-56 -55,-32, body extent -95,-125 95,125, height 65
R0402 [mil]
  rrect40% 22x24 smd: 1(-18.9,0) 2(19,0)
  body extent -20,-10 20,10, height 14
R0603 [mm]
  rrect40% 0.74x1 smd: 1(-0.68,0) 2(0.68,0)
  body extent -0.8,-0.4 0.8,0.4, height 0.8
R1206 [mil]
  rrect50% 63x71 smd: 1(-55.98,0) 2(56,0)
  body extent -61,-31 61,31, height 24
SJ [mil]
  rrect50% 46x63 smd: 1(-30,0) 2(30,0)
  silkscreen extent -65,-40 65,40, body extent -53,-31 53,31, height 4
SMA-SM [mil]
  rect 79x79 smd: A(79,0) C(-78.74,0)
  silkscreen extent -89,-49 89,50, body extent -105,-54 105,55, height 116
SOD323-R [mil]
  rect 24x24 smd: A(44,0) C(-43.31,0)
  body extent -50,-31 50,31, height 28
SOD523 [mil]
  rect 28x20 smd: A(27.56,0) C(-27.56,0)
  body extent -30,-16 30,16, height 28
SOT23-3 [mil]
  rect 32x36 smd: 1(-37.4,-39.37) 2(38,-39.37) 3(0,44)
  silkscreen extent -55,-4 56,28, body extent -59,-45 59,53, height 44
SOT669 [mil]
  rect 28x56 smd: 1(-75,-100.39) 2(-25,-100.39) 3(25,-100.39) 4(75,-100.39)
  rect 197x170 smd: MB(0,44)
  silkscreen extent -94,-77 95,-48, body extent -96,-120 97,128, height 43
TP1-27 [mil]
  rrect100% 50x50 smd: TP(0,0)
  body extent -25,-25 25,25, height 0
TQFP100_140140_012 [mil]
  rect 60x12 smd mask+4: 1(-314.96,237) 2(-314.96,217) 3(-314.96,197) 4(-314.96,178) 5(-314.96,158) 6(-314.96,138) 7(-314.96,119) 8(-314.96,99) 9(-314.96,79) 10(-314.96,60) 11(-314.96,40) 12(-314.96,20) 13(-314.96,0) 14(-314.96,-19.68) 15(-314.96,-39.37) 16(-314.96,-59.06) 17(-314.96,-78.74) 18(-314.96,-98.43) 19(-314.96,-118.11) 20(-314.96,-137.8) 21(-314.96,-157.48) 22(-314.96,-177.17) 23(-314.96,-196.85) 24(-314.96,-216.54) 25(-314.96,-236.22) 51(315,-236.22) 52(315,-216.54) 53(315,-196.85) 54(315,-177.17) 55(315,-157.48) 56(315,-137.8) 57(315,-118.11) 58(315,-98.43) 59(315,-78.74) 60(315,-59.06) 61(315,-39.37) 62(315,-19.68) 63(315,0) 64(315,20) 65(315,40) 66(315,60) 67(315,79) 68(315,99) 69(315,119) 70(315,138) 71(315,158) 72(315,178) 73(315,197) 74(315,217) 75(315,237)
  rect 12x60 smd mask+4: 26(-236.22,-314.96) 27(-216.54,-314.96) 28(-196.85,-314.96) 29(-177.17,-314.96) 30(-157.48,-314.96) 31(-137.8,-314.96) 32(-118.11,-314.96) 33(-98.43,-314.96) 34(-78.74,-314.96) 35(-59.06,-314.96) 36(-39.37,-314.96) 37(-19.69,-314.96) 38(0,-314.96) 39(20,-314.96) 40(40,-314.96) 41(60,-314.96) 42(79,-314.96) 43(99,-314.96) 44(119,-314.96) 45(138,-314.96) 46(158,-314.96) 47(178,-314.96) 48(197,-314.96) 49(217,-314.96) 50(237,-314.96) 76(237,315) 77(217,315) 78(197,315) 79(178,315) 80(158,315) 81(138,315) 82(119,315) 83(99,315) 84(79,315) 85(60,315) 86(40,315) 87(20,315) 88(0,315) 89(-19.69,315) 90(-39.37,315) 91(-59.06,315) 92(-78.74,315) 93(-98.43,315) 94(-118.11,315) 95(-137.8,315) 96(-157.48,315) 97(-177.17,315) 98(-196.85,315) 99(-216.54,315) 100(-236.22,315)
  silkscreen extent -276,-276 276,276, body extent -281,-281 281,281, height 47

## Part data
C1 C12 C13 C57 C58: library part 04025A220JAT2A, "CAP CER 0402 22pF 50V 5% C0G"
C2: library part C0805C106K8PACTU, "CAP CER 0805 10uF 10V 10% X5R"
C3 C17 C18 C23 C24 C25 C27 C28 C29 C32 C33 C34 C37 C38 C39 C42 C43 C44 C60 C62 C71 C72 C73 C74: library part C0603C104K5RACTU, "CAP CER 0603 100nF 50V 10% X7R"
C4 C6 C7 C8 C9 C10 C11 C14 C15 C26 C52 C56 C59 C67 C68 C69 C70: library part GRM155R71C104KA88D, "CAP CER 0402 100nF 16V 10% X7R"
C5: library part UPW1H471MHD1TO, "CAP ALU 470uF 50V 20%"
C16 C19 C20 C21 C22 C47 C48: library part GRM155R60J105KE19D, "CAP CER 0402 1uF 6.3V 10% X5R"
C31 C36 C41 C46: library part CC0603KRX7R7BB224, "CAP CER 0603 220nF 10V 10% X7R"
C53 C54: library part UVZ1H101MPD1TD, "CAP ALU 100uF 50V 20% 105C"
C63: library part CC0402KRX7R8BB472, "CAP CER 0402 4.7nF 25V 10% X7R"
D1 D3 D4 D5 D11 D13 D14 D15: "DIODE SOD523"
D2: "DIODE TVS 30V SMA"
D6 D10: library part SK310A, "DIODE Schottky 3A SMA"
D7: "DIODE DO-214AB"
D8: library part SMAJ30A, "DIODE TVS 30V SMA"
D12: library part ZENER-DIODE, "Z-Diode"
D16: "DIODE TVS"
F1 F2 F3: "FUSE PTH ATO"
F5: "FUSE 1812 PTC 750mA 6V"
FB1 FB2: "FERRITE BEAD 1806 60ohm"
FID1 FID2 FID3: "Fiducial"
J1: library part ATX24
JP1: "SMD solder jumper"
L2: "IND 0805 10uH 240mA 20%"
LED1 LED4 LED10: "LED 0805 Yellow"
LED2 LED3 LED6 LED8: "LED 0805 Red"
LED7: "LED 0805 Green"
"Net Tie": "Net Tie"
P1 P2: "HDR 20pos Vert Dual Row"
P3: library part "5X2 IDCw"
Q1 Q5: "Mosfet N-channel 60V 356A 117W 9.3mOhms"
Q8 Q9: "Mosfet N-Channel 30V 3.4A 63mOhm"
R1 R2: library part RC0402FR-0722RL, "RES 0402 22r 62.5mW 1%"
R4 R7 R8 R10 R14 R15 R19 R20: library part CRM1206-FX-R100ELF, "RES 1206 0.1r 0.5w 1%"
R5 R6 R31 R32 R36 R37: library part ERJ3EKF4701V, "RES 0603 4.7K 100mW 1%"
R9 R42 R56 R71: library part CRCW060310R0FKEA, "RES 0603 10r 100mW 1%"
R16 R21 R43 R57 R59 R60 R61 R62: library part RC0603FR-07100KL, "RES 100K OHM 1/10W 1% 0603 SMD"
R33 R34 R35: library part ERJ-3EKF1001V, "RES 0603 1K 100mW 1%"
R40 R58 R69 R70: library part RC0603JR-071K8L, "RES 0603 1.8K 100mW 5%"
R46 R47 R73: library part ERJ-3EKF1002V, "RES 0603 10K 100mW 1%"
R72: library part ERJ2GEJ105X, "RES 0402 1M 100mW 5%"
R74 R75: library part CR0603J000ELF, "RES 0603 0r 100mW 1%"
RN1 RN2 RN3: library part CAY16-103J4LF, "RES ARRAY 4 RES 10K 1206 62.5mW 5%"
RN5: library part CAY16-102J4LF, "RES ARRAY 4 RES 1K 1206 62.5mW 5%"
RV1 RV2: "VAR 0603 5V"
S1: "SWTCH Momentary Washable"
TP0 TP1 TP2 TP3 TP4 TP5 TP6 TP7 TP8 TP9 TP10 TP11 TP12 TP13 TP14 TP15 TP16 TP17 TP18 TP19 TP20 TP21 TP22 TP23 TP24 TP25 TP26 TP27 TP28 TP29 TP30 TP31 TP32 TP33 TP34 TP35 TP36 TP37 TP38 TP39 TP40 TP41 TP42 TP43 TP44 TP45 TP46 TP47 TP48 TP49 TP50 TP51 TP52 TP53 TP54 TP55 TP56 TP57 TP58 TP59 TP60 TP61 TP62 TP63 TP64 TP65 TP66 TP67: "Test Point"
U1: library part ATMEGA32U2-MU2
U2: library part ATMEGA2560AU
U5 U6 U7 U8: library part A4982QFN32, "Stepper Driver - Fully Integrated, Control and Power Stage"
U10: "4ch iCoupler"
X1 X5 X7 X9 X11 X12 X21 X22 X23 X27 X28: "Connector 2pos 2.54mm locking"
X2: "USB connector B PTH"
X3: library part MSTBV4, "PHOENIX"
X4 X6 X8 X14 X15: "PHOENIX CONNECTOR"
X17 X18: "PIN HEADER"
X35: "Connector 2x1 2.54mm PTH"
Y1 Y2: "Crystal 16mHz 10ppm 10pF"

## Free pads (board coordinates)
  round 275.59 hole 118.11: 0(4921.26,1181.1) 1(4921.26,3582.68) 2(1181.1,3582.68) 3(1181.1,1181.1)

## Via types
v1: diameter 30, hole 15, Top to Bottom, 422 vias
v2: diameter 30, hole 15, Top to Bottom, tented both sides, 131 vias
v3: diameter 50, hole 28, Top to Bottom, tented both sides, 3 vias
v4: diameter 32, hole 15, Top to Bottom, 1 vias
v5: diameter 30, hole 15, Top to Bottom, tented top, 1 vias
v6: diameter 32, hole 15, Top to Bottom, tented both sides, 1 vias

## Nets (pads, with @x,y where several pads share a name; then routed paths per layer and width w, separated by ;. In a path a pad name is that pad's centre, name@x,y a point inside that pad or via, vN(x,y) a via of type N, cw(c..) or ccw(c..) an arc to the next point about the centre after c; other vN are vias at no path point)
12V-IN: F3.1 FB1.1 FB2.1 J1.10 J1.11 TP66.TP | length 173.1
  Top w50: FB1.1@4108.66,1618.11 4222.44,1618.11 v1(4231.3,1609.25) ; 4358.27,1651.66 FB2.1@4358.27,1698.43
  other v1: 4569.88,1597.44 4625.98,1600.39 4408.46,1605.32 4629.92,1679.13 4724.41,1718.5 4663.39,1722.44 4632.87,1763.78 4623.03,1805.12 4634.84,1860.24 3960.63,1867.13 4711.61,1881.89 4646.65,1903.54 4562.99,1907.48 4426.18,1924.21 4062.99,1929.13 4142.72,1932.09 3960.63,1933.07 3959,2004 3960.63,2078.74 4023,2124 4162,2125 4122,2137 4077,2138 3976,2186 3972,2250
+12V: C3.1 C5.1 C27.1 C29.1 C32.1 C34.1 C37.1 C39.1 C42.1 C44.1 C71.1 C72.1 C73.1 C74.1 D2.C F1.2 U5.3 U5.22 U6.3 U6.22 U7.3 U7.22 U8.3 U8.22 | length 7826.5
  Top w8: C71.1@1107.24,1638.03 C71.1@1115.22,1646.01 ; 1161.42,1646.01 U5.22@1192.4,1646.01 ; U5.3@1381.89,1646.01 1413.39,1646.01 ; C27.1@1412.06,1892.1 1412.06,1927.81 v1(1413.39,1929.13) ; C29.1@1463.58,1643.9 1471.26,1651.57 v5(1500.98,1651.57) ; v1@1525.59,1652.56 1554.33,1652.56 C72.1@1562.99,1643.9 ; C72.1@1555.12,1643.9 C72.1@1557.23,1646.01 ; 1614.17,1646.01 U6.22@1643.31,1646.01 ; U6.3@1832.8,1646.01 1866.14,1646.01 ; 2050.39,1644.88 2080.8,1644.88 U7.22@2081.93,1646.01 ; U7.3@2271.42,1646.01 2303.15,1646.01 ; C37.1@2296.06,1889.76 C37.1@2298.23,1891.93 2318.89,1912.59 v1(2318.89,1901.57) ; C39.1@2366.93,1645.67 2381.89,1630.71 v1@2381.89,1610.24 ; C74.1@2876.97,1643.9 2881.75,1639.12 U8.22@2969.96,1639.12 ; U8.3@3159.45,1639.12 3257.03,1639.12 C44.1@3261.81,1643.9
  Top w12: C42.1@3172.24,1892.1 3206.33,1892.1 v1(3208.66,1889.76)
  Top w20: C44.1@3261.81,1643.9 C44.1@3263.58,1645.67
  Top w24: C71.1@1107.24,1643.03 1110.22,1646.01 1115.22,1646.01 1161.42,1646.01 ; 1415.5,1643.9 C29.1@1463.58,1643.9 ; C72.1@1562.99,1643.9 1612.06,1643.9 ; 1866.14,1646.01 1908.32,1646.01 C34.1@1909.45,1644.88 ; C73.1@2003.94,1644.88 2050.39,1644.88 ; 2303.15,1646.01 2303.49,1645.67 C39.1@2366.93,1645.67 ; C3.1@3444.88,1262.99 3483.46,1262.99 D2.C@3547.24,1326.77
  Top w25: C44.1@3263.58,1645.67 v1(3326.77,1645.67)
  Top w50: F1.2@3744.09,1380.63 3753.8,1390.34 C5.1@4114.17,1390.34
  Top w80: D2.C@3547.24,1326.77 3601.1,1380.63 F1.2@3744.09,1380.63
  Supply w8: v1(1413.39,1929.13) 1500.98,1841.54 v5(1500.98,1651.57) ; v1(1854.33,1917.32) 1862.01,1917.32 1944.88,1834.45 v1(1944.88,1649.61) ; v1(2318.89,1901.57) 2318.89,1913.25 2381.89,1850.25 v1@2381.89,1610.24 ; v1(3208.66,1889.76) 3279.34,1889.76 3335.15,1833.95 v1@3335.15,1645.67
  Supply w32: v1(1082.68,1673.23) 1081.09,1671.65 1081.09,1405.17 1129.26,1357 1512.95,1357 1515.75,1359.8 1526.28,1370.32
  Supply w50: 1515.75,1359.8 1515.75,1637.8 ; 1956.94,1370.32 v1@1956.94,1622.05 ; 2381.89,1337 v1@2381.89,1604.33 ; v1(2838.58,1590.55) 2838.58,1484.71 2849.8,1473.5 2849.8,1280.13 2907.67,1338 ; v1@3335.15,1645.67 3335.15,1310.52 3348.63,1324
  Supply w80: 1526.28,1370.32 1956.94,1370.32 1965.58,1370.32 1998.91,1337
  Supply w140: 1998.91,1337 2381.89,1337 ; 2381.89,1279.53 2850.39,1279.53 ; 2907.67,1338 3346,1338 3358,1326 3554.35,1326 3589.29,1360.94 3589.29,1380.63 F1.2@3744.09,1380.63 3642.99,1279.53 3741.89,1180.63 F1.2@3744.09,1180.63
  other v1: 2866.14,1590.55 2370.08,1606.3 2397.64,1606.3 3326.77,1618.11 1968.5,1622.05 1972.44,1649.61 1531.5,1652.56
  other v2: 1073,1643
+12V2: C53.1 C60.1 D6.C D8.C F2.2 F5.1 R40.2 R73.2 TP3.TP X3.3 | length 5237
  Top w8: R73.2@3192.13,2877.96 3217.87,2877.96 3279.39,2816.43 3279.39,2804.67 3321.41,2762.65 3397.38,2762.65 3429,2731.03 3429,2561 3467.19,2522.81 3824,2522.81 3824,2545.81 3837.43,2559.23 3837.43,2611.38 3847.28,2621.24 3893.47,2621.24 3993.51,2721.28 4059.87,2721.28 D8.C@4141.73,2803.15 ; R40.2@4019.69,3638.58 4070.09,3688.98 4342.52,3688.98 4389.76,3641.73 4389.76,3452.76 4348.03,3411.02 X3.3@4248.03,3411.02
  Top w24: C60.1@4448.03,1374.02 4483.39,1374.02 C53.1@4574.8,1282.6
  Top w50: D6.C@3996.06,3377.95 4014.37,3396.26 X3.3@4248.03,3396.26 ; 4248.03,2803.15 4397.64,2952.76 4397.64,3288.36 4382,3304 4381.53,3304 4354,3331.53 4354,3332 4274.98,3411.02 X3.3@4248.03,3411.02 ; F2.2@4314.96,2391.02 F2.2@4314.96,2591.02
  Top w60: C53.1@4574.8,1282.6 4634.24,1282.6 4804.32,1452.68 4804.32,2338.18
  Top w80: D8.C@4141.73,2803.15 F5.1@4217.52,2803.15 4248.03,2803.15 4248.03,2657.95 F2.2@4314.96,2591.02
  Bottom w7: F2.2@4300,2605.98 F2.2@4314.96,2591.02
  Bottom w8: X3.3@4248.03,3377.28 X3.3@4248.03,3411.02 4388.98,3411.02 TP3.TP@4400,3400
+12V3: C54.1 C62.1 D7.C D10.C F3.2 R58.2 TP16.TP X3.1 | length 1605.7
  Top w8: C62.1@3916.54,2590.55 3916.54,2583.46 3933,2567 v1(3933,2556)
  Top w24: R58.2@3968.5,3282.68 v1(3968.5,3311.02) ; D10.C@3996.06,2921.26 4055.12,2921.26 4144.88,3011.02 X3.1@4248.03,3011.02
  Top w100: C54.1@3836.61,2074.8 3899,2137.19 3899,2379.32 D7.C@3925.2,2405.51 ; F3.2@4083.94,2405.51 F3.2@4098.43,2391.02
  Bottom w7: 4100,3000 v1(4149,3012)
  Bottom w8: v1(3968.5,3311.02) 4342.52,3311.02 4385.83,3267.72 4385.83,3047.24 4349.61,3011.02 X3.1@4248.03,3011.02
  other v1: 3966,2373 3975,2430 4181,2479 4051.18,2492.13 4097.44,2492.13 4149,2496 3933.07,2503.94 3974,2563 3939,2630 3976.36,2638.01 4059,2687 4147,2687 4100.39,2691.93 4245.08,2939.96 4189.96,2944.88 4324.8,2953.74 4152.56,2956.69 4334.65,3066.93 4296.26,3079.72 4195.87,3080.71 4250.98,3082.68
+12V4: F5.2 R69.2 R70.2 TP33.TP X9.2 X35.1 | length 3557.7
  Top w8: X35.1@3492,3058 3492,2931.16 3477.32,2916.48 3477.32,2877.91 R69.2@3508,2847.23 ; X9.2@4616.93,3622.05 4616.93,3524.8 4637,3504.73 ; v2(4637,3470) 4637,3504.73 ; R70.2@4637.79,3436.22 4637.79,3503.94 4637,3504.73
  Top w24: F5.2@4398,2847 4435.54,2884.54 4525.22,2884.54 4577.37,2936.7 4577.37,3081.51 4724.69,3228.83 4736.13,3228.83 4772.74,3265.45 4772.74,3317.23 4763.49,3326.48 4763.49,3571.16 4712.6,3622.05 X9.2@4616.93,3622.05
  Supply w24: X35.1@3492,3058 3492,3101 3516,3125 3516,3163 3451.47,3227.53 3451.47,3625.1 3479.9,3653.53 3563.53,3653.53 3632,3722 4584,3722 4616.93,3689.07 X9.2@4616.93,3622.05
  Bottom w8: TP33.TP@4600,3500 4630,3470 v2(4637,3470) 4607,3500 TP33.TP@4600,3500
AREF: C6.1 U2.98 | length 84.4
  Top w8: U2.98@2931.79,2716.85 3004.61,2716.85 C6.1@3012.8,2708.66
BED-HEAT: R56.1 R57.1 U2.1 | length 1372.6
  Top w7: R56.1@3645.23,3340 3645.23,3341.23 3675.39,3371.39 3727.61,3371.39 3748.23,3350.77 R57.1@3748.23,3350
  Top w8: U2.1@2853.79,2834.96 2898.97,2834.96 3004.55,2940.54 3058.44,2940.54 3064.98,2934 v2(3140,2934) ; v2(3736,3308) R57.1@3753.23,3341
  Bottom w8: v2(3140,2934) 3150,2924 3314.77,2924 3330,2939.23 3330,3077.56 3355.44,3103 3477.77,3103 3564,3189.23 3564,3225.95 3664.05,3326 3718,3326 v2(3736,3308)
D+: R2.1 RV2.2 TP28.TP X2.3 | length 346.5
  Top w8: v2@1471.61,2715 R2.1@1596.1,2715
  Bottom w8: X2.3@1366.84,2568.9 1366.84,2666.84 TP28.TP@1400,2700 1456,2700 v2(1471,2715)
D-: R1.1 RV1.2 TP27.TP X2.2 | length 201.7
  Top w8: v2(1502,2647) 1516.77,2661.77 RV1.2@1545,2661.77 ; RV1.2@1545,2660 R1.1@1596.1,2660
  Bottom w8: X2.2@1445.84,2568.9 TP27.TP@1500,2600 v2@1500,2639
DTR: JP1.1 JP1.2 RN5.5 TP24.TP U1.13 U10.3 | length 997.8
  Top w7: v1@1839,2338 1848.46,2338 1858,2347.54 U10.3@1889.76,2347.54
  Top w8: v1(1811.02,2917.32) 1847.24,2917.32 RN5.5@1872.28,2892.29 ; U1.13@1874.49,2720 1911.93,2720 v1(1912.4,2720.47)
  Bottom w7: TP24.TP@1800,2300 1800,2308 v1(1830,2338) 1830,2423 1855.5,2448.5 1855.5,2801.51 JP1.2@1848.43,2808.58 ; v1(1811.02,2917.32) 1811.02,2909.45 1826.77,2893.7 1826.77,2890.24 JP1.1@1848.43,2868.58 1890.75,2826.26 1890.75,2780
  Bottom w8: JP1.2@1848.43,2808.58 JP1.1@1848.43,2868.58 ; 1890.75,2780 1890.75,2742.13 v1(1912.4,2720.47)
E0-DIR: TP11.TP U2.41 U8.20 | length 1408.9
  Top w8: U2.41@2301.83,2460 2346.81,2460 2348.25,2461.44 2393.43,2461.44 2404.43,2472.44 v1(2421.26,2472.44) ; v2(2755,2000) 2800,1955 2800,1734.1 2861.28,1672.82 2927.54,1672.82 2933.68,1678.96 U8.20@2969.96,1678.96
  Bottom w8: v1(2421.26,2472.44) 2377.66,2428.84 2377.66,2189.37 2536.23,2030.8 2688.33,2030.8 2719.13,2000 v2(2755,2000) TP11.TP@2800,2000
E0-EN: R62.2 TP14.TP U2.74 U8.5 | length 1066.9
  Top w8: U2.74@2833.79,2205 2833.79,2115.03 2897.82,2051 2970.21,2051 2984.21,2037 3063,2037 v2(3070,2030) ; U8.5@3159.45,1678.96 3197.23,1678.96 3204.37,1671.82 3265.1,1671.82 3295.28,1702 3295.28,1848.28 3325.96,1878.96 3325.96,1957.5 v1(3295.28,1988.19)
  Bottom w8: v2(3070,2030) TP14.TP@3100,2000 3283.46,2000 v1(3295.28,1988.19)
E0-MS1: U2.86 U8.11 | length 856.9
  Top w8: U2.86@2931.79,2480 2969.8,2480 2990.79,2459.01 2990.79,2453.28 3144,2300.07 3144,1967.63 3122.37,1946 3121.25,1946 3083.47,1908.22 3083.47,1822.43 3094.49,1811.41 U8.11@3094.49,1763.61
E0-MS2: U2.85 U8.12 | length 827.3
  Top w8: U2.85@2931.79,2460 2965.76,2460 2973.79,2451.97 2973.79,2449.07 3129,2293.86 3129,1977.79 3066.47,1915.26 3066.47,1815.39 3074.8,1807.06 U8.12@3074.8,1763.61
E0-STEP: TP13.TP U2.56 U8.17 | length 1075.6
  Top w8: v1(2470.47,2138.78) 2478.99,2147.3 U2.56@2478.99,2205 ; v1(2807.24,2058.07) 2829.31,2036 2900,2036 2941,1995 v2(2950,1995) 2899,1944 2881.01,1944 2863.72,1926.72 2863.72,1750.15 2871.06,1742.82 2933.58,1742.82 2938.38,1738.02 U8.17@2969.96,1738.02
  Bottom w8: v1(2470.47,2138.78) 2470.47,2117.77 2530.18,2058.07 v1(2807.24,2058.07) ; v2(2950,1995) 2995,1995 TP13.TP@3000,2000
E1-DIR: P2.P$13 U2.42 | length 1710.1
  Top w8: U2.42@2301.83,2441 2392.2,2441 2397.64,2446.44 2432.02,2446.44 2463.7,2478.11 v1(2463.7,2489.29)
  Bottom w8: v1(2463.7,2489.29) 2476.33,2501.92 2476.33,2607.14 2463.38,2620.09 2463.38,3203.69 2518.2,3258.51 2518.2,3379.89 2711.81,3573.49 2994.82,3573.49 P2.P$13@3023.82,3544.49
E1-EN: P2.P$11 U2.75 | length 1815.1
  Top w8: U2.75@2853.79,2205 2853.79,2247.49 2858.27,2251.97 v1(2929.13,2251.97)
  Bottom w8: v1(2929.13,2251.97) 2929.13,2441.3 2856.71,2513.72 2856.71,2514.71 2841.48,2529.94 2840.49,2529.94 2820.45,2549.98 2820.45,2769.45 3155.35,3104.35 3222.47,3104.35 3281,3162.88 3281,3237.31 P2.P$11@2973.82,3544.49